# EAGLE board LDO Design Block (EAGLE 9.6.2)
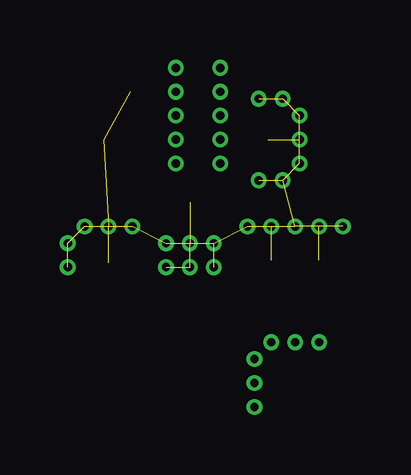
[diagram p0: board, top side]
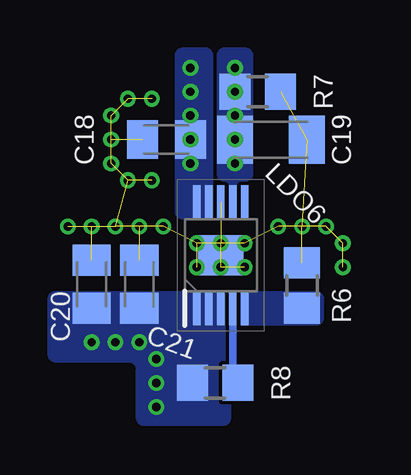
[diagram p1: board, bottom side, seen from below]

No outline drawn. Coordinates in mm, seen from the top.
Copper layers (1*16): Top 0.035mm / dielectric 1.6mm / Bottom 0.035mm
Design rules "Elecrow_2-layer_PCB_eagle_rule": minimum track width 6mil, minimum drill 12mil, track to track 6mil, track to pad 6mil, pad to pad 6mil, via to via 8mil, smd to smd 0mil, copper to edge 20mil, drill to drill 10mil, minimum pad ring 6mil, minimum via ring 6mil, stop-mask expansion 0mil, vias tented up to drill 100mil, thermal gap 10mil

## Footprints (pad centres in the part's own frame; a part is rotated, then mirrored left to right if it is on the bottom)
C0805K = smd 1.3 x 1.6: 1 -1,0; 2 1,0
C1206K = smd 1.5 x 2: 1 -1.5,0; 2 1.5,0
SOP50P490X110-11N = smd 1.425 x 0.3: 1 -2.212,1; 2 -2.212,0.5; 3 -2.212,0; 4 -2.212,-0.5; 5 -2.212,-1; 6 2.212,-1; 7 2.212,-0.5; 8 2.212,0; 9 2.212,0.5; 10 2.212,1 | smd 1.68 x 1.88: 11 0,0
R0805 = smd 1.3 x 1.5: 1 -0.95,0; 2 0.95,0

## Placement (x,y rotation side)
C18  [C0805K]  8.19,11.92 0 bottom
C19  [C1206K]  3.84,11.92 180 bottom
C20  [C0805K]  11.32,5.89 270 bottom
C21  [C0805K]  9.32,5.89 270 bottom
LDO6  LT3042  [SOP50P490X110-11N]  5.93,7.1 90 bottom
R6  [R0805]  2.53,5.84 90 bottom
R7  [R0805]  4.39,13.92 0 bottom
R8  [R0805]  6.16,1.78 0 bottom

## Library data of the parts
C18-C21 = rcl; SPICEPREFIX: C
LDO6 = LT3042EMSE#PBF; DESCRIPTION: LINEAR TECHNOLOGY - LT3042EMSE#PBF - LDO, ADJ, 0.2A, 0V-15V, MSOP-10; HEIGHT: 1.1mm; MANUFACTURER_NAME: Linear Technology; MANUFACTURER_PART_NUMBER: LT3042EMSE#PBF; MOUSER_PART_NUMBER: 584-LT3042EMSE#PBF; MOUSER_PRICE-STOCK: https://www.mouser.co.uk/ProductDetail/Analog-Devices-Linear-Technology/LT3042EMSEPBF?qs=oahfZPh6IAJ3XP16d20ITw%3D%3D
R6-R8 = rcl; SPICEPREFIX: R

## Nets
DGND: C18.1 C19.1 C20.1 C21.1 LDO6.8 LDO6.11 R6.2 R7.2
N$38: LDO6.5 R6.1
N$53: C19.2 LDO6.7 R7.1
N$54: LDO6.4 R8.2
N$63: C20.2 C21.2 LDO6.1 LDO6.2 LDO6.3 R8.1
N$135: C18.2 LDO6.9 LDO6.10

## Tracks (layer width: path | path; a pad name or v marks a point on that pad's centre or on a via)
DGND  (via drill 0.35)  (30 unrouted)
  other vias: 8.8,13.62 9.8,13.62 10.5,12.92 10.5,11.92 10.5,10.93 9.8,10.23 8.8,10.23 4.93,7.6 5.93,7.6 6.92,7.6 6.92,6.61 5.93,6.61 4.93,6.61 8.33,8.31 9.32,8.31 10.32,8.31 11.32,8.31 12.31,8.31 3.53,8.31 2.53,8.31 1.54,8.31 0.84,7.6 0.84,6.61
N$38
  pour Bottom (no thermals): 5.35,5.61 1.95,5.61 arc90 1.63,5.28 1.63,4.5 arc90 1.95,4.18 5.35,4.18
N$53  (via drill 0.35)
  other vias: 5.34,13.92 5.34,11.92 5.34,10.93 5.34,12.92 5.34,14.91
  pour Bottom (no thermals): 6.09,10.51 6.09,15.42 arc90 5.77,15.75 4.91,15.75 arc90 4.58,15.42 4.58,10.51 arc90 4.91,10.18 arc-90 5.1,9.99 5.1,8.6 5.58,8.6 5.58,9.99 arc-90 5.77,10.18 arc90
N$54
  Bottom 0.305: LDO6.4 5.43,2 R8.2
N$63  (via drill 0.35)
  other vias: 9.32,3.48 10.32,3.48 11.32,3.48 8.62,2.78 8.62,1.78 8.62,0.78
  pour Bottom (no thermals): 5.51,5.61 5.51,0.33 arc90 5.83,0 9.13,0 arc90 9.46,0.33 9.46,2.32 arc-90 9.78,2.64 12.82,2.64 arc90 13.15,2.97 13.15,5.28 arc90 12.82,5.61
N$135  (via drill 0.35)
  other vias: 7.19,13.92 7.19,12.92 7.19,11.92 7.19,10.93 7.19,14.91
  pour Bottom (no thermals): 6.25,8.6 7.51,8.6 arc90 7.84,8.93 7.84,15.42 arc90 7.51,15.75 6.57,15.75 arc90 6.25,15.42